# Altium PCB airDrums2.PcbDoc
Units mm, origin at the board's own origin, x right, y up, seen from the top; angles counter-clockwise.
Board outline 112 x 14 mm, 2 copper layers (Top Layer, Bottom Layer); 9 components, 12 nets, 55 pads, 3 vias.
Unrouted connection lines stored in the file: 1.
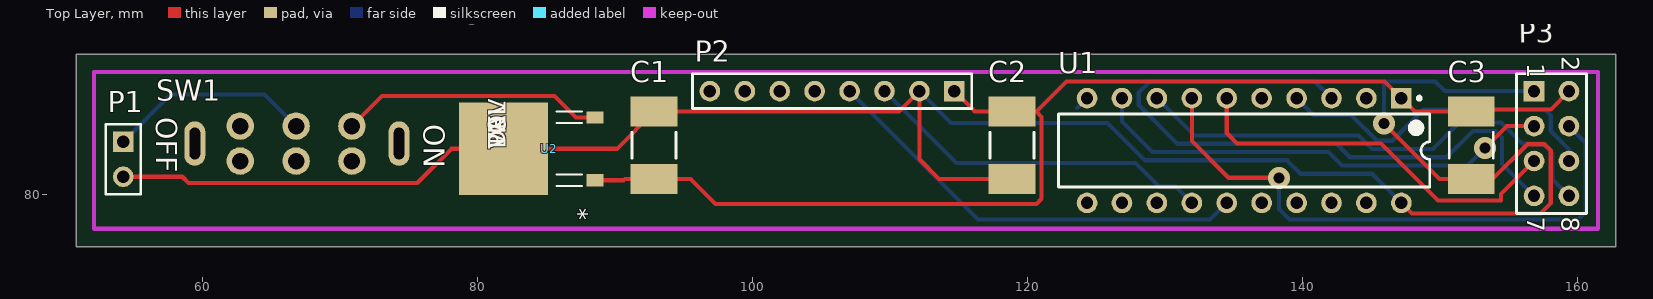
[diagram p0: Top Layer view]
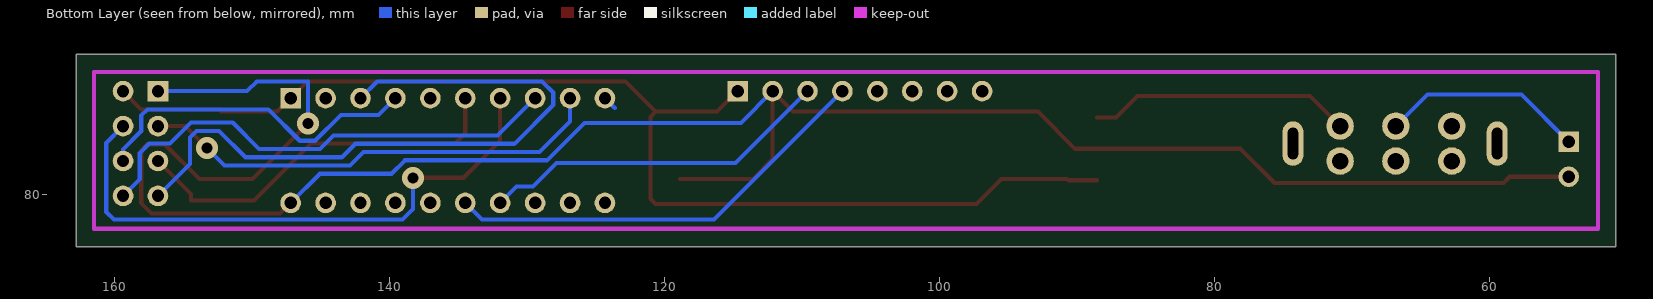
[diagram p1: Bottom Layer view, seen from below]

## Layer stack, top to bottom
Top Layer: signal copper 0.0356
Dielectric: dielectric 0.32, FR-4, Dk 4.8
Bottom Layer: signal copper 0.0356

## Board outline
50.8,76.2 162.8,76.2 162.8,90.2 50.8,90.2

## Design rules (kind name [scope] priority, off if disabled: settings)
Clearance [All] p1: gap=0.3
HoleSize [All] p1: absolutevalues=TRUE maxlimit=2.54 minlimit=0.3 maxpercent=80.000 minpercent=20.000
PolygonConnect [All] p1: connectstyle=Relief reliefconductorwidth=0.254 reliefentries=4 polygonreliefangle="90 Angle" airgapwidth=0.254
RoutingVias [All] p1: holewidth=0.8 width=1.6 viastyle="Through Hole" minholewidth=0.711 minwidth=1.27 maxholewidth=0.711 maxwidth=1.27
SolderMaskExpansion [All] p1: expansion=0.102
Width [All] p1: maxlimit=0.3 minlimit=0.3 preferedwidth=0.3
27 further rules are at their usual default settings.

## Components (designator, comment, footprint, x,y, rotation, side; value= is the part's Value field where it differs from the comment)
C1 "100uF" CAPC6032X28N 92.837,83.566 r270 top
C2 "100uF" CAPC6032X28N 118.872,83.566 r90 top
C3 "100uF" CAPC6032X28N 152.273,83.566 r90 top
P1 "Header 2" HDR1X2 54.229,83.82 r270 top
P2 "Header 8" HDR1X8 114.681,87.503 r180 top
P3 "Header 4X2" HDR2X4 156.845,87.503 r270 top
SW1 "switch" Switch 67.056,82.423 r270 top
U1 "MSP430G2553IN20" TI-N20 135.763,83.185 r270 top
U2 "LP38690_NDP_3" TD03B 82.042,83.312 r90 top

## Footprints (in the part's own frame and the unit in brackets; to place one, negate y for a bottom-side part, rotate by r counter-clockwise, add the part's x,y. Pads: shape width x height; smd on the part's side, far side on the other; paste and mask are expansions set on the pad)
CAPC6032X28N [mm] "Chip Capacitor, 2-Leads, Body 6.00x3.25mm, IPC Medium Density"
  rect 2.2x3.4 smd: 1(-2.45,0) 2(2.45,0)
  silkscreen extent -0.95,-1.6 0.95,1.6, body extent -3.1,-1.7 3.1,1.7, height 2.8
HDR1X2 [mm] "Connector; Header; 2 Position"
  rect 1.5x1.5 hole 0.9: 1(0,0)
  round 1.5 hole 0.9: 2(2.54,0)
  silkscreen extent -1.27,-1.27 3.81,1.27
HDR1X8 [mm] "Connector; Header; 8 Position"
  rect 1.5x1.5 hole 0.9: 1(0,0)
  round 1.5 hole 0.9: 2(2.54,0) 3(5.08,0) 4(7.62,0) 5(10.16,0) 6(12.7,0) 7(15.24,0) 8(17.78,0)
  silkscreen extent -1.27,-1.27 19.05,1.27
HDR2X4 [mm] "Connector; Header; 4x2 Position"
  rect 1.5x1.5 hole 0.9: 1(0,0)
  round 1.5 hole 0.9: 2(0,2.54) 3(2.54,0) 4(2.54,2.54) 5(5.08,0) 6(5.08,2.54) 7(7.62,0) 8(7.62,2.54)
  silkscreen extent -1.27,-1.27 8.89,3.81
Switch [mm]
  round 2 hole 1.2: 1(-2.54,3.81) 2(-2.54,-0.254) 3(-2.54,-4.318) 4(0,-4.318) 5(0,-0.254) 6(0,3.81)
  oval 3.24x1.524 hole 0.762 slot 2.3 at 0 deg: 7(-1.27,7.239) 8(-1.27,-7.62)
TD03B [mil]
  rect 35x48 smd: 1(-89.96,-256) 3(89.96,-256)
  rect 265x256 smd: 2(0,6)
  silkscreen extent -106,-218 106,-146
TI-N20 [mm] "DIP, 20-Leads, Body 25.4x6.35 mm, Pitch 2.54 mm"
  rect 1.5x1.5 hole 0.9: 1(-3.81,11.43)
  round 1.5 hole 0.9: 2(-3.81,8.89) 3(-3.81,6.35) 4(-3.81,3.81) 5(-3.81,1.27) 6(-3.81,-1.27) 7(-3.81,-3.81) 8(-3.81,-6.35) 9(-3.81,-8.89) 10(-3.81,-11.43) 11(3.81,-11.43) 12(3.81,-8.89) 13(3.81,-6.35) 14(3.81,-3.81) 15(3.81,-1.27) 16(3.81,1.27) 17(3.81,3.81) 18(3.81,6.35) 19(3.81,8.89) 20(3.81,11.43)
  silkscreen extent -3.93,-13.5 2.65,13.5, body extent -3.95,-13.45 3.95,13.45, height 5.08

## Part data
C1 C2 C3: library part "Cap Semi", "Capacitor (Semiconductor SIM Model)"
P1: "Header, 2-Pin"
P2: "Header, 8-Pin"
P3: "Header, 4-Pin, Dual row"
U1: "16 MHz Mixed Signal Microcontroller with 16 KB Flash, 512 B SRAM and 24 GPIOs, -40 to 85 degC, 20-pin DIP (N), Pb-Free (RoHS)"
U2: "Imported"

## Via types
v1: diameter 1.6, hole 0.8, Top Layer to Bottom Layer, 3 vias

## Nets (pads, with @x,y where several pads share a name; then routed paths per layer and width w, separated by ;. In a path a pad name is that pad's centre, name@x,y a point inside that pad or via, vN(x,y) a via of type N, cw(c..) or ccw(c..) an arc to the next point about the centre after c; other vN are vias at no path point)
CE: P3.3 U1.9 | length 34.2
  Top Layer w0.3: v1(153.264,83.363) 154.864,84.963 P3.3
  Bottom Layer w0.3: U1.9 126.873,85.293 129.091,83.075 141.893,83.075 142.873,82.095 151.996,82.095 v1(153.264,83.363)
CSN: P3.4 U1.7 | length 42.5
  Top Layer w0.3: U1.7 131.953,83.871 134.62,81.204 v1(138.303,81.204)
  Bottom Layer w0.3: v1(138.303,81.204) 138.303,78.918 139.065,78.156 160.045,78.156 160.604,78.715 160.604,83.744 P3.4
GND: C1.1 C2.1 C3.1 P1.2 P2.2 P3.1 U1.20 U2.2 | length 157.2
  Top Layer w0.3: P1.2 58.522,81.28 58.979,80.823 75.616,80.823 78.105,83.312 U2.2 90.133,83.312 C1.1 110.654,86.016 P2.2 112.141,82.55 113.575,81.116 C2.1 ; v1(145.923,85.166) 149.973,81.116 C3.1 153.836,81.116 156.362,83.642 157.607,83.642 158.064,83.185 158.064,79.375 157.302,78.613 147.955,78.613 U1.20
  Bottom Layer w0.3: P2.2 114.449,85.195 125.82,85.195 128.54,82.475 138.891,82.475 139.871,81.495 145.073,81.495 U1.20 ; 123.622,86.284 124.333,86.995 ; v1(145.923,85.166) 145.923,88.214 149.657,88.214 150.368,87.503 P3.1
IRQ: P3.8 U1.8 | length 35.6
  Bottom Layer w0.3: U1.8 132.133,84.275 144.073,84.275 145.053,83.295 149.486,83.295 151.403,85.213 154.436,85.213 155.956,83.693 157.48,83.693 158.166,83.007 158.166,81.102 P3.8
MISO: P3.7 U1.3 | length 50
  Bottom Layer w0.3: U1.3 140.894,88.214 128.905,88.214 128.092,87.401 128.092,86.51 130.927,83.675 142.493,83.675 143.473,82.695 150.482,82.695 152.4,84.613 154.038,84.613 154.514,84.138 154.514,82.214 P3.7
MOSI: P3.6 U1.4 | length 24.8
  Bottom Layer w0.3: U1.4 140.792,85.776 143.534,85.776 145.415,83.895 146.531,83.895 148.819,86.182 157.607,86.182 158.064,85.725 158.064,84.587 159.385,83.266 P3.6
NetP1_1: P1.1 SW1.2 | length 14.9
  Bottom Layer w0.3: P1.1 57.658,87.249 64.516,87.249 SW1.2
NetSW1_1: SW1.1 U2.3 | length 19.2
  Top Layer w0.3: SW1.1 73.05,87.147 85.598,87.147 87.148,85.597 U2.3
SCK: P3.5 U1.6 | length 28.4
  Top Layer w0.3: U1.6 134.493,84.455 135.255,83.693 145.72,83.693 149.86,79.553 154.432,79.553 154.432,80.01 P3.5
SCL: P2.3 U1.14 | length 25.7
  Bottom Layer w0.3: P2.3 114.828,82.276 127.858,82.276 129.565,80.569 130.759,80.569 U1.14
SDA: P2.4 U1.15 | length 31.8
  Bottom Layer w0.3: P2.4 116.408,78.156 133.274,78.156 U1.15
VCC: C1.2 C2.2 C3.2 P2.1 P3.2 U1.1 U2.1 | length 87.8
  Top Layer w0.3: U2.1 90.627,81.027 90.716,81.116 C1.2 95.504,81.116 97.321,79.299 120.65,79.299 121.031,79.68 121.031,85.635 120.65,86.016 ; P2.1 116.168,86.016 C2.2 120.65,86.016 ; P3.2 158.064,86.182 152.273,86.182 C3.2 148.172,86.016 U1.1 145.974,88.214 122.848,88.214 120.65,86.016
pads on no net: P2.5 P2.6 P2.7 P2.8 SW1.3 SW1.4 SW1.5 SW1.6 SW1.7 SW1.8 U1.2 U1.5 U1.10 U1.11 U1.12 U1.13 U1.16 U1.17 U1.18 U1.19

## Keep-outs
Keep-Out Layer:
  lines w0.3: 52.1,77.5 161.5,77.5 161.5,88.9 52.1,88.9 52.1,77.5

## Silkscreen, mask and mechanical layers (free items; w line width, h text height)
Drill Drawing:
  text ".LEGEND" at 167.88,81.28 h1.52
  text "Drill Drawing." at 167.88,78.74 h1.52

## Dimensions
52.1,77.5 to 161.5,77.5 on Mechanical 1
52.1,77.5 to 52.1,88.9 on Mechanical 1

## Text inside footprints (layer, text, board x,y; h text height)
P3: Top Overlay "8" at 158.877,78.359 h1.27 r270; Top Overlay "7" at 156.337,78.359 h1.27 r270; Top Overlay "1" at 156.337,89.535 h1.27 r270; Top Overlay "2" at 158.877,90.043 h1.27 r270
SW1: Top Overlay "OFF" at 56.642,85.598 h1.52 r270; Top Overlay "ON" at 76.073,85.09 h1.52 r270
U2: Top Overlay "*" at 88.544,78.107 h1.27 r90; Top Overlay "PN" at 82.042,83.312 h1.27 r90; Top Overlay "DEV" at 82.042,83.312 h1.27 r90; Top Overlay "VAL" at 82.042,83.312 h1.27 r90; Top Overlay "TOL" at 82.042,83.312 h1.27 r90; Mechanical 1 "*" at 88.544,78.107 h1.27 r90; Mechanical 1 "RefDes2" at 82.042,83.312 h1.27 r90